# Altium PCB QuadrotorPCB.PcbDoc
Units mil, origin at the board's own origin, x right, y up, seen from the top; angles counter-clockwise.
Board outline 4000 x 4000 mil, 2 copper layers (Top Layer, Bottom Layer); 19 components, 13 nets, 113 pads, 12 vias.
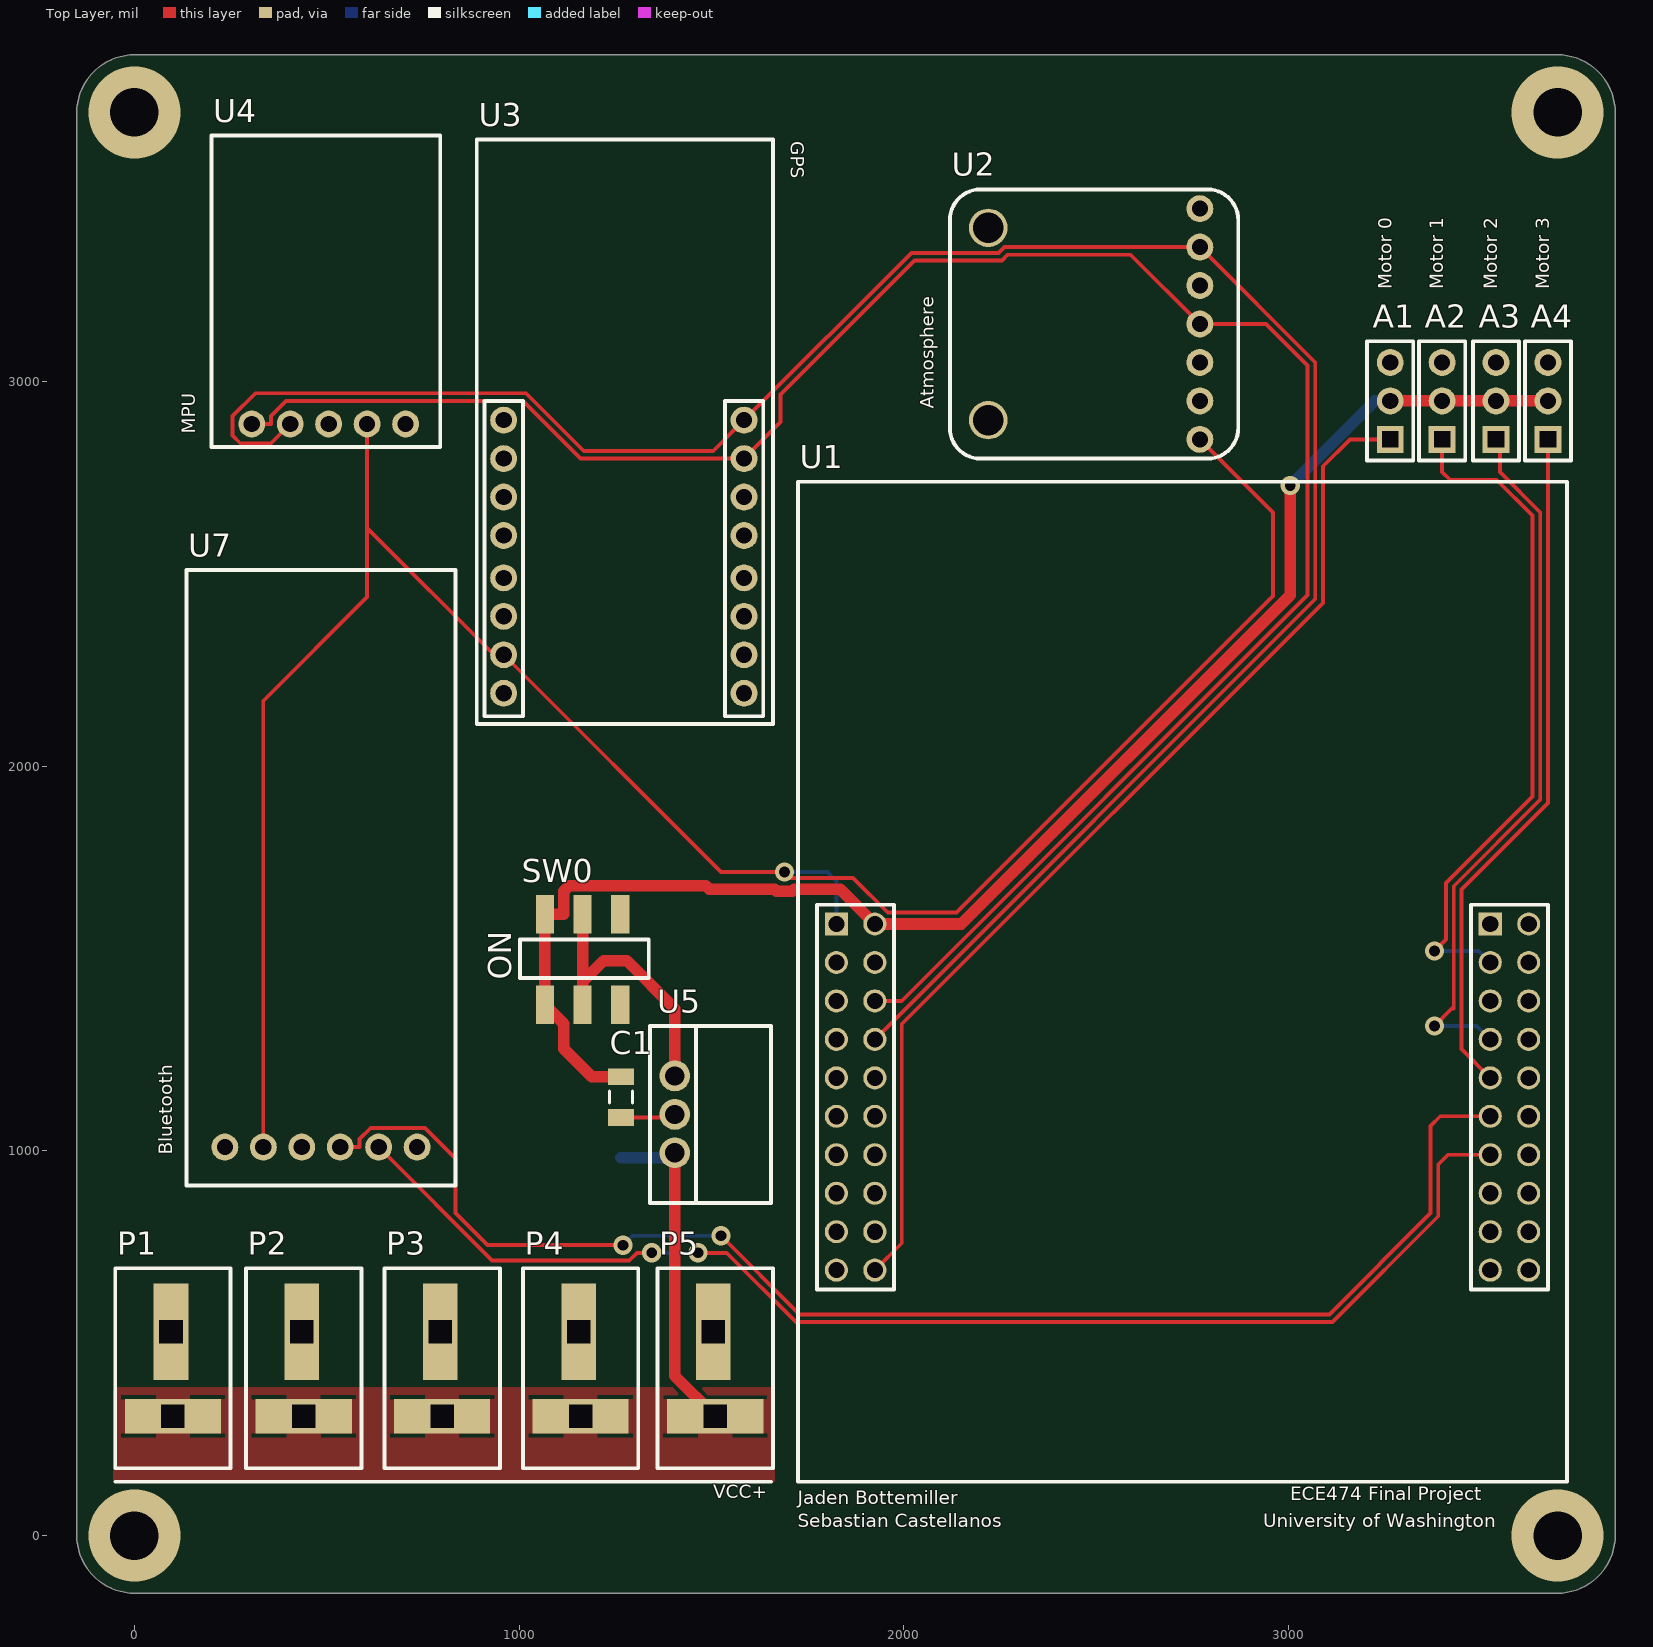
[diagram p0: Top Layer view]
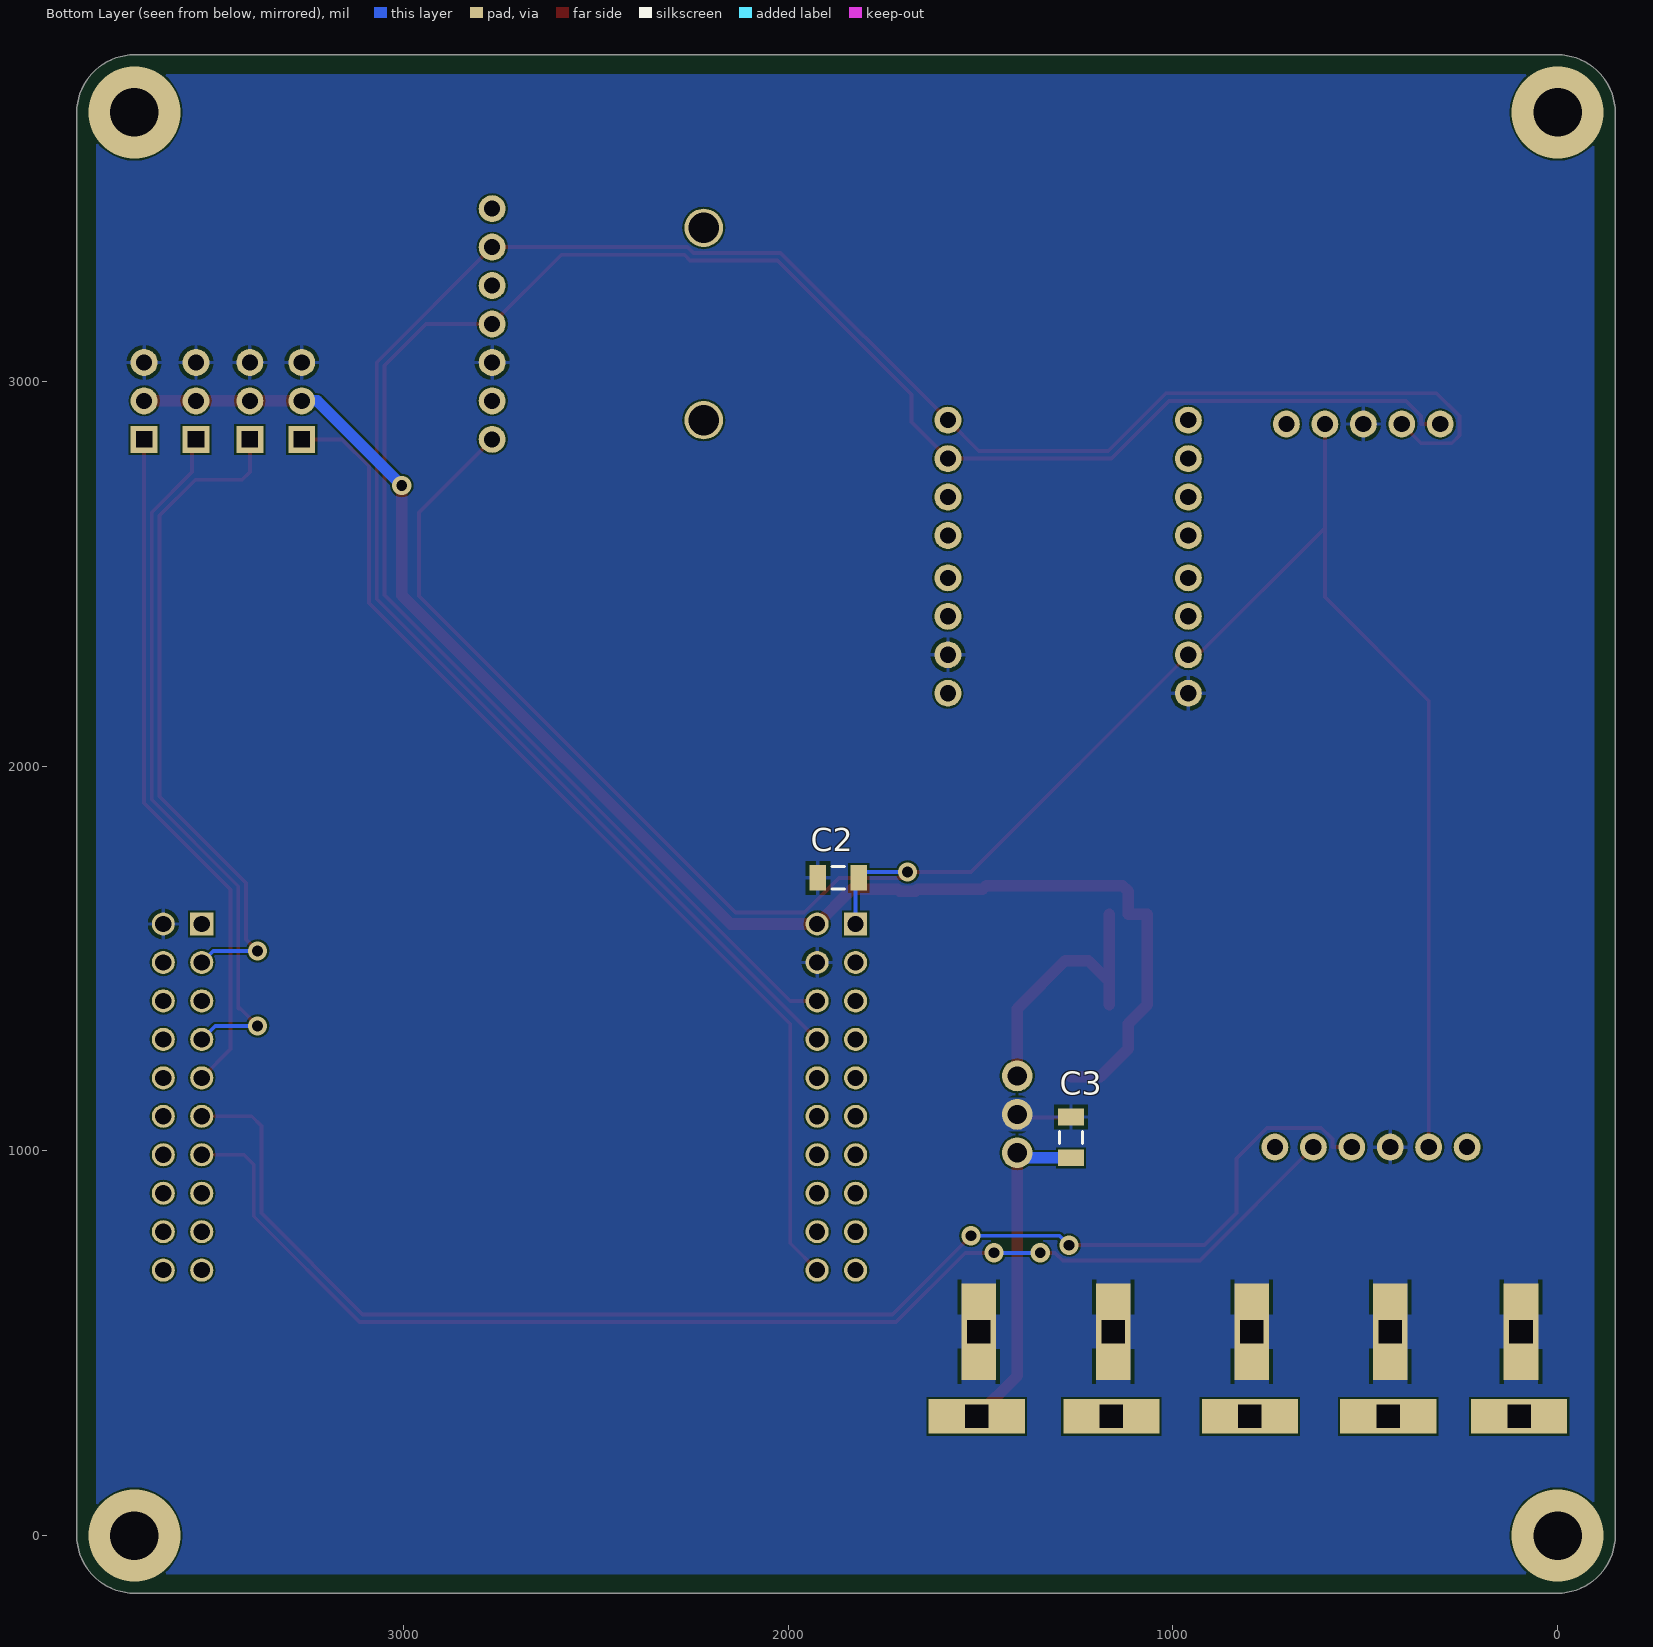
[diagram p1: Bottom Layer view, seen from below]

## Layer stack, top to bottom
Top Solder: solder mask 0.4, Solder Resist, Dk 3.5
Top Layer: signal copper 1.4
Dielectric 1: dielectric 12.6, FR-4, Dk 4.8
Bottom Layer: signal copper 1.4
Bottom Solder: solder mask 0.4, Solder Resist, Dk 3.5

## Board outline
0,-150 cw(c0,0) -150,0 -150,3700 cw(c0,3700) 0,3850 3700,3850 cw(c3700,3700) 3850,3700 3850,0 cw(c3700,0) 3700,-150

## Design rules (kind name [scope] priority, off if disabled: settings)
Clearance [All] p1: gap=5 ignorepadtopadclearanceinfootprint=TRUE
PolygonConnect GND_HP_Connect [InNet('GND') vs InComponent(P1) Or InComponent(P2) Or InComponent(P3) Or InComponent(P4) Or InComponent(P5)Or InComponent(U5) Or InComponent('C1')] p1: connectstyle=Relief reliefconductorwidth=90 reliefentries=4 polygonreliefangle="90 Angle" airgapwidth=10
PolygonConnect VCC_Connect [InNet('VCC')] p2: connectstyle=Relief reliefconductorwidth=90 reliefentries=4 polygonreliefangle="90 Angle" airgapwidth=10
PolygonConnect [All] p3: connectstyle=Relief reliefconductorwidth=10 reliefentries=4 polygonreliefangle="90 Angle" airgapwidth=10
RoutingVias [All] p1: holewidth=28 width=50 viastyle="Through Hole" minholewidth=28 minwidth=50 maxholewidth=28 maxwidth=50
SolderMaskExpansion [All] p1: expansion=4
Width GND_Width [InNet('GND')] p1: maxlimit=80 minlimit=10 preferedwidth=10 minimp=50.000000 maximp=50.000000 favimp=50.000000
Width 5V_VCC_HC_WIDTH [InNet('+5') Or InNet('VCC') Or InNet('+5_SW')] p2: maxlimit=40 minlimit=20 preferedwidth=30 minimp=50.000000 maximp=50.000000 favimp=50.000000
Width [All] p3: maxlimit=10 minlimit=10 preferedwidth=10
30 further rules are at their usual default settings.

## Classes and differential pairs
component class Sensors: A1 A2 A3 A4 U2 U3 U4 U7
component class Power: C1 C2 C3 P1 P2 P3 P4 P5 SW0 U5
component class Microcontroller: U1

## Components (designator, comment, footprint, x,y, rotation, side; value= is the part's Value field where it differs from the comment)
A1 "PWM_CONN" DUPONT 3215,2805 r0 top
A2 "PWM_CONN" DUPONT 3350,2805 r0 top
A3 "PWM_CONN" DUPONT 3490,2805 r0 top
A4 "PWM_CONN" DUPONT 3625,2805 r0 top
C1 "Cap Semi" C1206 1265,1140 r90 top value=100pF
C2 "Cap Semi" C1206 1870,1710 r180 bottom value=100pF
C3 "Cap Semi" C1206 1265,1035 r270 bottom value=100pF
P1 "Dean's Connector" DEAN_CONN 250,695 r180 top
P2 "Dean's Connector" DEAN_CONN 590,695 r180 top
P3 "Dean's Connector" DEAN_CONN 950,695 r180 top
P4 "Dean's Connector" DEAN_CONN 1310,695 r180 top
P5 "Dean's Connector" DEAN_CONN 1660,695 r180 top
SW0 "SW" SW 1337,1440 r90 top
U1 "TIVA_Board" TIVA_AB 1825,1590 r0 top
U2 "BME280" BME280 2870,2800 r90 top
U3 "GPS" GPS_FOOTPRINT 910,2130 r0 top
U4 "MPU" MPU 200,2840 r0 top
U5 "VXO7805" VXO78-1000 1655,865 r90 top
U7 "Bluetooth Module" Bluetooth 135,910 r0 top

## Footprints (in the part's own frame and the unit in brackets; to place one, negate y for a bottom-side part, rotate by r counter-clockwise, add the part's x,y. Pads: shape width x height; smd on the part's side, far side on the other; paste and mask are expansions set on the pad)
Bluetooth [mil]
  round 70 hole 42: 1(100,100) 2(200,100) 3(300,100) 4(400,100) 5(500,100) 6(600,100)
  silkscreen extent 0,0 700,1600
BME280 [mil]
  round 70 hole 42: 1(50,100) 2(150,100) 3(250,100) 4(350,100) 5(450,100) 6(550,100) 7(650,100)
  round 100 hole 80: ""(100,650) ""(600,650)
  silkscreen extent 0,0 700,750
C1206 [mm] "Chip Capacitor, Body 3.2x1.6mm, IPC High Density"
  rect 1.1x1.7 smd: 1(-1.35,0) 2(1.35,0)
  silkscreen extent -0.4,-0.75 0.4,0.75, body extent -1.7,-0.9 1.7,0.9, height 1.3
DEAN_CONN [mil]
  rect 250x90 hole 60 square: 1(150,385)
  rect 90x250 hole 60 square: 2(155,165)
  silkscreen extent 0,0 300,520
DUPONT [mil]
  rect 70x70 hole 42 square: 1(50,45)
  round 70 hole 42: 2(50,145) 3(50,245)
  silkscreen extent -10,-10 110,300
GPS_FOOTPRINT [mil]
  round 70 hole 42: 1(50,770) 2(50,670) 3(50,570) 4(50,470) 5(50,360) 6(50,260) 7(50,160) 8(50,60) 9(675,60) 10(675,160) 11(675,260) 12(675,360) 13(675,470) 14(675,570) 15(675,670) 16(675,770)
  silkscreen extent -20,-20 750,1500
MPU [mil]
  round 70 hole 42: 1(105,50) 2(205,50) 3(305,50) 4(405,50) 5(505,50)
  silkscreen extent 0,-10 595,800
SW [mil]
  rect 100x47 smd: 1(-60,270) 2(-60,172) 3(-60,74) 4(175,270) 5(175,172) 6(175,74)
  silkscreen extent 10,0 110,335
TIVA_AB [mil]
  rect 60x60 hole 42: 1(0,0) 21(1700,0)
  round 60 hole 42: 2(0,-100) 3(0,-200) 4(0,-300) 5(0,-400) 6(0,-500) 7(0,-600) 8(0,-700) 9(0,-800) 10(0,-900) 11(100,-900) 12(100,-800) 13(100,-700) 14(100,-600) 15(100,-500) 16(100,-400) 17(100,-300) 18(100,-200) 19(100,-100) 20(100,0) 22(1700,-100) 23(1700,-200) 24(1700,-300) 25(1700,-400) 26(1700,-500) 27(1700,-600) 28(1700,-700) 29(1700,-800) 30(1700,-900) 31(1800,-900) 32(1800,-800) 33(1800,-700) 34(1800,-600) 35(1800,-500) 36(1800,-400) 37(1800,-300) 38(1800,-200) 39(1800,-100) 40(1800,0)
  silkscreen extent -100,-1450 1900,1150
VXO78-1000 [mil]
  round 80 hole 50: 1(130,250) 2(230,250) 3(330,250)
  silkscreen extent 0,0 460,315

## Part data
C1 C2 C3: "Capacitor (Semiconductor SIM Model)", LatestRevisionDate=29-May-2009, LatestRevisionNote="IPC-7351 Footprint Added.", PackageDescription="Chip Capacitor", PackageReference=C1206, Published=8-Jun-2000, Publisher="Altium Limited"

## Via types
v1: diameter 50, hole 28, Top Layer to Bottom Layer, 8 vias
v2: diameter 240, hole 126, Top Layer to Bottom Layer, 4 vias

## Nets (pads, with @x,y where several pads share a name; then routed paths per layer and width w, separated by ;. In a path a pad name is that pad's centre, name@x,y a point inside that pad or via, vN(x,y) a via of type N, cw(c..) or ccw(c..) an arc to the next point about the centre after c; other vN are vias at no path point)
3.3V: C2.2 U1.1 U2.1 U3.7 U4.4 U7.2 | length 5844.4
  Top Layer w10: U7.2 335,2170 605,2440 605,2620 ; U4.4 605,2620 ; U2.1 2960,2660 2960,2442.43 2137.57,1620 1958.64,1620 1868.64,1710 1705,1710 v1(1690,1725) 1525,1725 U3.7 935,2290 605,2620
  Bottom Layer w10: v1(1690,1725) 1801.85,1725 C2.2 1825,1701.85 U1.1
+5: A1.2 A2.2 A3.2 A4.2 C1.2 SW0.1 SW0.4 U1.20 | length 3998.8
  Top Layer w30: C1.2 1188.67,1193.15 1116.5,1265.32 1116.5,1330.5 SW0.1 SW0.4 1116.5,1615 1116.5,1675.36 1131.14,1690 1485,1690 1495,1680 1664.29,1680 1669.29,1675 1710.71,1675 1715.71,1680 1835,1680 U1.20 2150,1590 3005,2445 v1(3005,2730) ; A1.2 A2.2 A3.2 A4.2
  Bottom Layer w30: v1(3005,2730) 3225,2950 A1.2
+5_SW: SW0.2 SW0.5 U5.3 | length 724.6
  Top Layer w30: SW0.2 1165,1440 ; SW0.5 1165,1440 ; U5.3 1405,1370 1280,1495 1220,1495 1165,1440
GND: A1.3 A2.3 A3.3 A4.3 C1.1 C2.1 C3.1 P1.2 P2.2 P3.2 P4.2 P5.2 U1.19 U1.40 U2.3 U3.8 U3.10 U4.3 U5.2 U7.3 | length 154.9
  Top Layer w10: C1.1@1273.15,1095 C1.1 1396.85,1086.85 U5.2
NetA1_1: A1.1 U1.11 | length 2776.6
  Top Layer w10: U1.11 1995,760 1995,1330 3090,2425 3090,2780 3160,2850 A1.1
NetA2_1: A2.1 U1.22 | length 1761.7
  Top Layer w10: v1(3380,1520) 3410,1550 3410,1696.57 3635,1921.57 3635,2651.72 3541.72,2745 3420,2745 3400,2765 A2.1
  Bottom Layer w10: v1(3380,1520) 3495,1520 U1.22
NetA3_1: A3.1 U1.24 | length 1849
  Top Layer w10: v1(3380,1325) 3425,1370 3430,1370 3430,1688.28 3655,1913.28 3655,2660 3550,2765 3550,2840 A3.1
  Bottom Layer w10: v1(3380,1325) 3490,1325 U1.24
NetA4_1: A4.1 U1.25 | length 1784.3
  Top Layer w10: U1.25 3450,1265 3450,1680 3675,1905 A4.1
NetU1_17: U1.17 U2.6 U3.16 U4.2 | length 5709.5
  Top Layer w10: U4.2 355,2840 275,2840 255,2860 255,2910.71 314.29,2970 1018.28,2970 1168.28,2820 1505,2820 U3.16 2020,3335 2246.92,3335 2261.92,3350 U2.6 3070,3050 3070,2435 U1.17
NetU1_18: U1.18 U2.4 U3.15 U4.1 | length 5383.8
  Top Layer w10: U4.1 355,2890 355,2910.71 394.29,2950 1010,2950 1160,2800 U3.15 1680,2895 1680,2966.72 2028.28,3315 2255.21,3315 2270.21,3330 2590,3330 U2.4 2941.72,3150 3050,3041.72 3050,2445 1995,1390 U1.18
NetU1_26: U1.26 U7.4 | length 3673.6
  Top Layer w10: U7.4 585,1010 585,1030.71 614.29,1060 755.71,1060 835,980.71 835,838.28 918.28,755 v1(1270,755) ; v1(1525,779.56) 1729.56,575 3106.72,575 3370,838.28 3370,1065 3395,1090 U1.26
  Bottom Layer w10: v1(1270,755) 1294.56,779.56 v1(1525,779.56)
NetU1_27: U1.27 U7.5 | length 3354.3
  Top Layer w10: U7.5 930,715 1286.57,715 1306.57,735 v1(1345,735) ; v1(1465,735) 1540,735 1720,555 3115,555 3390,830 3390,965 3415,990 U1.27
  Bottom Layer w10: v1(1345,735) v1(1465,735)
VCC: C3.2 P1.1 P2.1 P3.1 P4.1 P5.1 U5.1 | length 873.9
  Top Layer w30: U5.1 1405,415 P5.1
  Bottom Layer w30: C3.2 1391.85,981.85 U5.1
pads on no net: SW0.3 SW0.6 U1.2 U1.3 U1.4 U1.5 U1.6 U1.7 U1.8 U1.9 U1.10 U1.12 U1.13 U1.14 U1.15 U1.16 U1.21 U1.23 U1.28 U1.29 U1.30 U1.31 U1.32 U1.33 U1.34 U1.35 U1.36 U1.37 U1.38 U1.39 U2. U2.2 U2.5 U2.7 U3.1 U3.2 U3.3 U3.4 U3.5 U3.6 U3.9 U3.11 U3.12 U3.13 U3.14 U4.5 U7.1 U7.6
copper on no net:
  other v2: 0,0 3700,0 0,3700 3700,3700

## Polygon pours and split planes (outlines as drawn)
no net on Bottom Solder (solid): 115,3575
GND on Bottom Layer "Bottom Layer-GND" (solid, pour order 4): -95,3800 3800,3800 3800,-100 -95,-100
no net on Bottom Layer "Bottom Layer-No Net" (solid, pour order 2): -135,3845
VCC on Top Layer "Top Layer-VCC" (solid, pour order 0): -55,375 -45,385 1665,385 1665,140 -55,140

## Silkscreen, mask and mechanical layers (free items; w line width, h text height)
Top Overlay:
  lines w10: -50,140 1655,140
  text "GPS" at 1695,3625 h60 r270
  text "Motor 0" at 3280,3240 h60 r90
  text "Motor 1" at 3415,3240 h60 r90
  text "Motor 2" at 3555,3240 h60 r90
  text "Motor 3" at 3690,3240 h60 r90
  text "Atmosphere" at 2090,2930 h60 r90
  text "MPU" at 170,2865 h60 r90
  text "ON" at 980,1445 h60 r90
  text "Bluetooth" at 110,990 h60 r90
  text "VCC+" at 1505,85 h60
  text "ECE474 Final Project" at 3005,80 h60
  text "Jaden Bottemiller" at 1725,70 h60
  text "Sebastian Castellanos" at 1725,10 h60
  text "University of Washington" at 2935,10 h60
Mechanical 1:
  the board outline again, w10